# Altium PCB mccd.PcbDoc
Units mil, origin at the board's own origin, x right, y up, seen from the top; angles counter-clockwise.
Board outline 1680 x 1250 mil, 2 copper layers (Top, Bottom); 9 components, 12 nets, 61 pads, 0 vias.
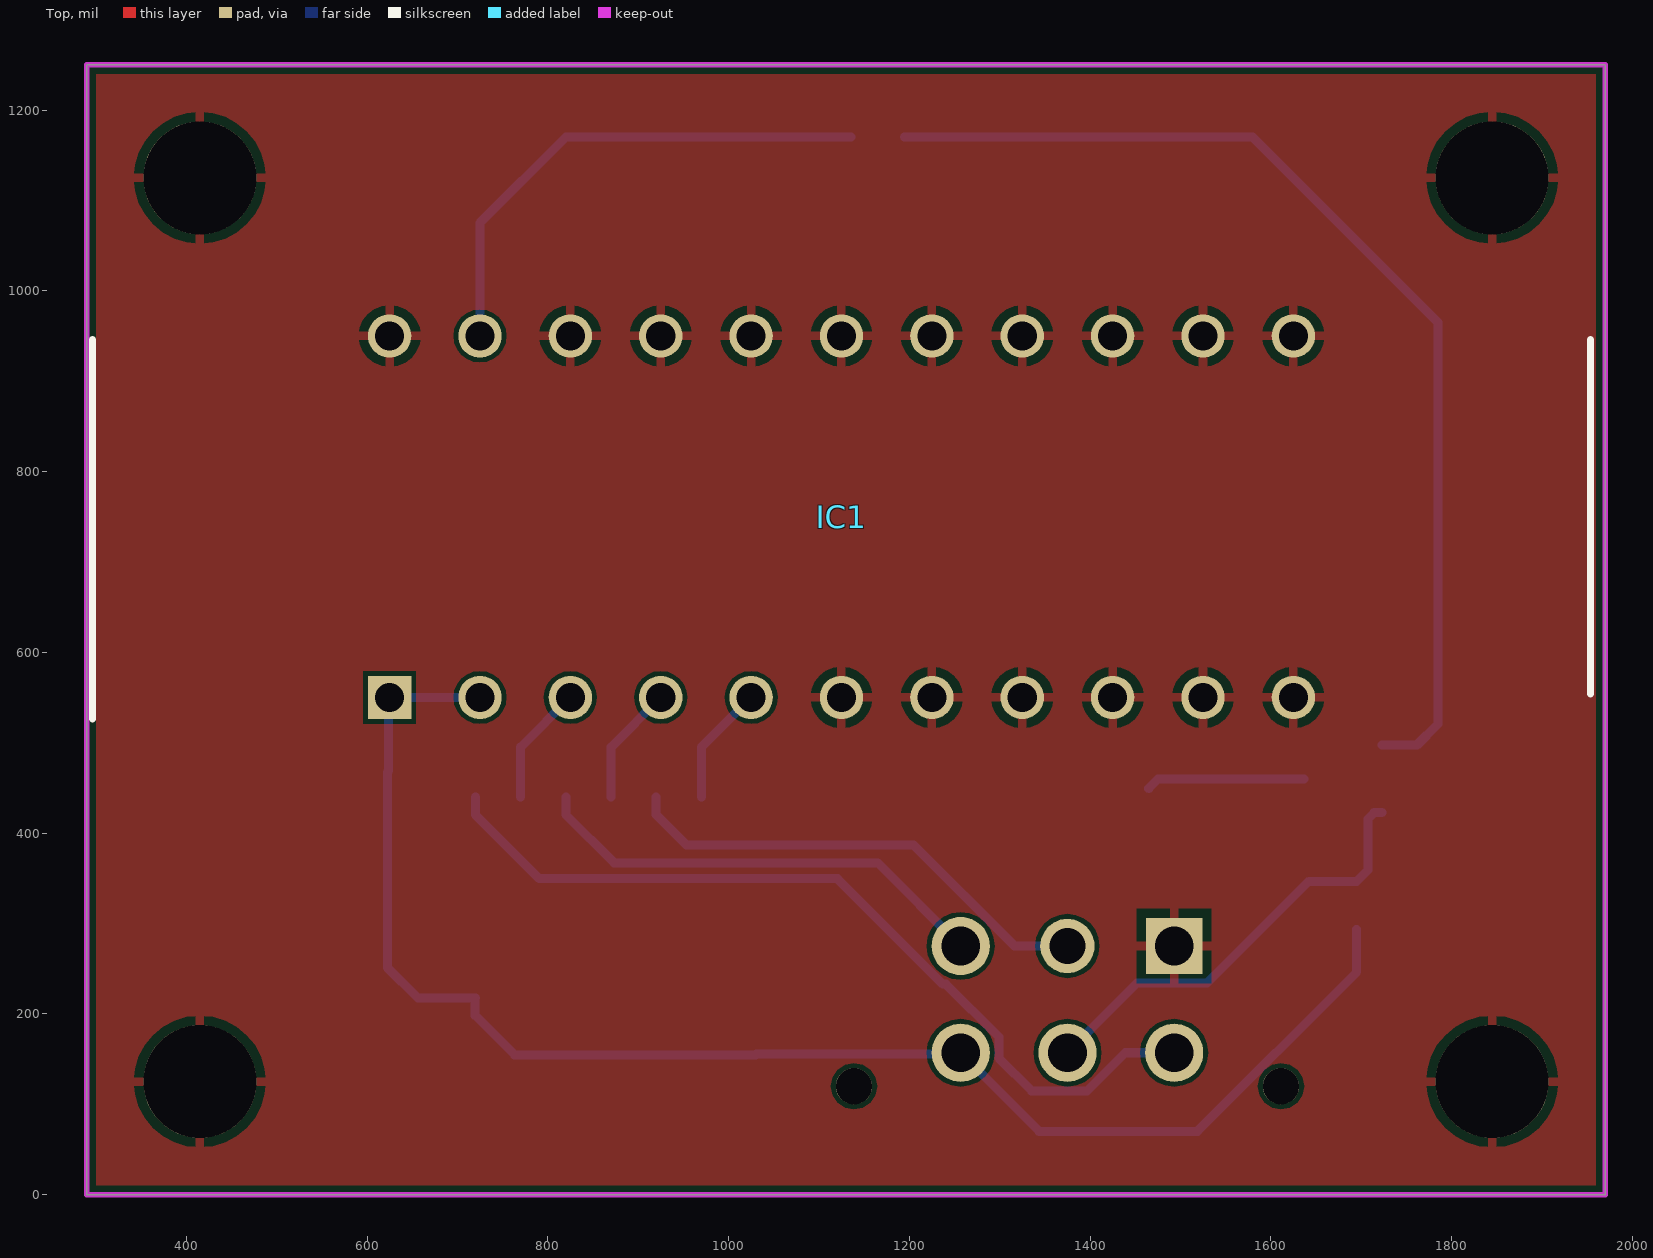
[diagram p0: Top view]
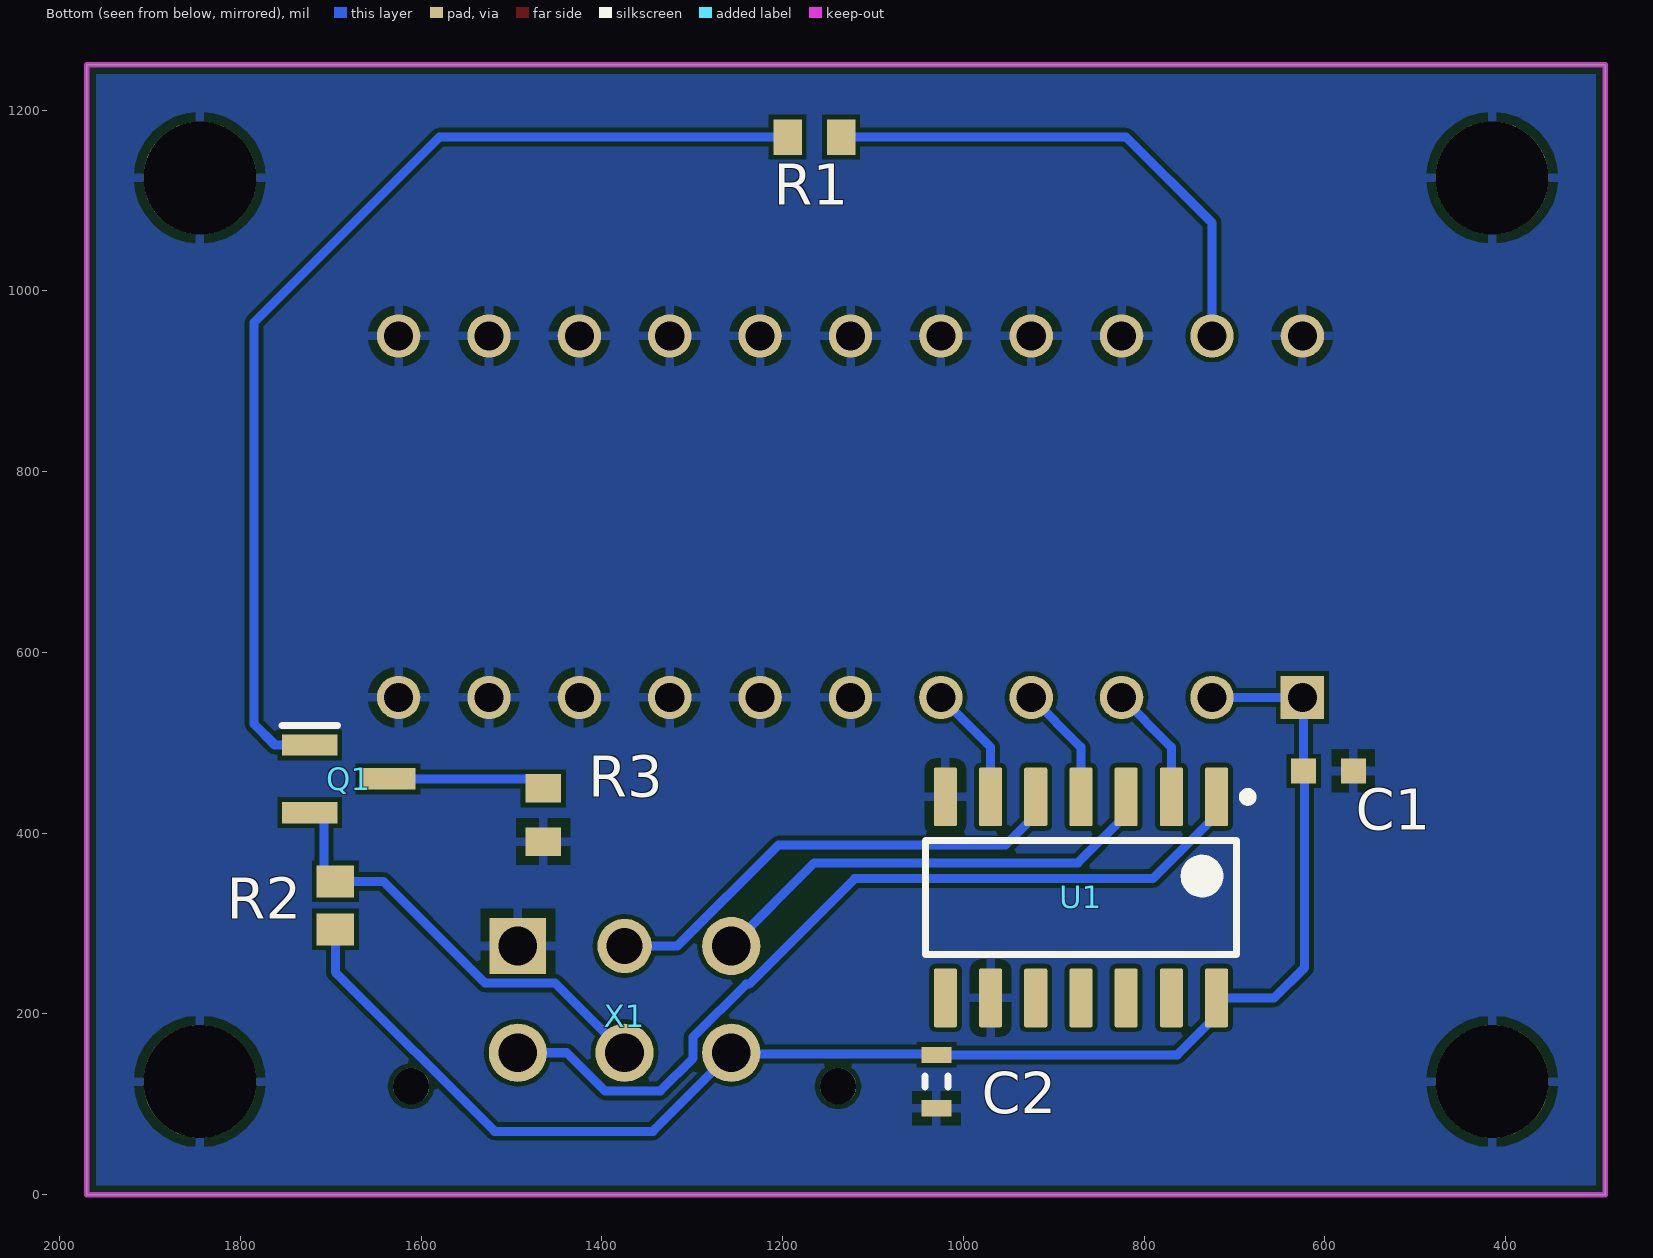
[diagram p1: Bottom view, seen from below]

## Layer stack, top to bottom
Top Solder: solder mask 0.4, Solder Resist, Dk 3.5
Top: signal copper 1.378
Dielectric 1: dielectric 12.6, FR-4, Dk 4.8
Bottom: signal copper 1.378
Bottom Solder: solder mask 0.4, Solder Resist, Dk 3.5

## Board outline
290,0 1970,0 1970,1250 290,1250

## Design rules (kind name [scope] priority, off if disabled: settings)
BoardOutlineClearance mdCopperDimension [All] p1: gap=10 ignorepadtopadclearanceinfootprint=FALSE except(0: Arc-SplitContinuation Track-SplitContinuation SMDPad-SplitContinuation THPad-SplitContinuation Via-SplitContinuation Fill-SplitContinuation Poly-SplitContinuation Region-SplitContinuation Text-SplitContinuation)
Clearance "Clearance (Same Net)" [All] p1: gap=5 ignorepadtopadclearanceinfootprint=FALSE except(0: SMDPad-SMDPad SMDPad-THPad SMDPad-Via)
Clearance [All] p2: gap=5 ignorepadtopadclearanceinfootprint=FALSE except(0: Arc-Poly Track-Poly SMDPad-Poly THPad-Poly Via-Poly Fill-Poly Poly-Poly Poly-Region Poly-Text; 10: Poly-Hole)
HoleSize [All] p1: absolutevalues=TRUE maxlimit=100000 minlimit=12 maxpercent=80.000 minpercent=20.000
HoleToHoleClearance mdDrill [All] p1: gap=10 allowstackedmicrovias=TRUE
PasteMaskExpansion mlMinCreamFrame [All] p1: expansion=0
PolygonConnect PolygonConnect_For_PolygonThermal_ON_Width160000_Gap100000 [InPolygonClass('PolygonThermal_ON_Width160000_Gap100000') vs Not IsVia] p1: connectstyle=Relief reliefconductorwidth=16 reliefentries=4 polygonreliefangle="90 Angle" airgapwidth=10
PolygonConnect ThermalVias [IsVia] p2: connectstyle=Direct reliefconductorwidth=10 reliefentries=4 polygonreliefangle="90 Angle" airgapwidth=10
PolygonConnect [All] p3: connectstyle=Relief reliefconductorwidth=10 reliefentries=4 polygonreliefangle="90 Angle" airgapwidth=10
RoomDefinition mccd [InComponentClass('mccd')] p1: confinementstyle=ConfineIn formatcopy=TRUE lockcomponents=FALSE outline 290,0 1970,0 1970,1250 290,1250
RoutingVias [All] p1: holewidth=12 width=24 viastyle="Through Hole" minholewidth=12 minwidth=24 maxholewidth=100 maxwidth=100
SolderMaskExpansion mlMinStopFrame [All] p1: expansion=2
Width [All] p1: maxlimit=10000 minlimit=5 preferedwidth=5
27 further rules are at their usual default settings.

## Classes and differential pairs
component class mccd: C1 C2 IC1 Q1 R1 R2 R3 U1

## Components (designator, comment, footprint, x,y, rotation, side; value= is the part's Value field where it differs from the comment)
C1 "C1608X5R1E106M080AC" CAPC1608X100X20VL10T10 596.1,468.66 r0 bottom
C2 "CGA3E2X7R1H104K080AA" CAPC1608X90X20LL10 1030,125 r90 bottom
IC1 "TCD1304DG(8Z,AW)" DIP1016W62P254L4160H372Q22N 1125,750 r90 top
Q1 "2SA1162-GR,LF" SOT95P260X140-3N 1680,460 r180 bottom
R1 "RC0603FR-07150RL" RESC1608X55X25ML10T15 1165,1170 r180 bottom
R2 "CRCW06032K20JNEA" RESC1609X50X30ML10T20 1695,320 r90 bottom
R3 "RC0603FR-07150RL" RESC1608X55X25ML10T15 1465,420 r90 bottom
U1 "SN74HC04DR" D0014A_M 870,328.78 r270 bottom
X1 "Molex - Micro-Fit 3.0 Series connector,  3.00mm (0.118\") pitch header, 6 positions." 44914-0601 1375,275 r0 bottom

## Footprints (in the part's own frame and the unit in brackets; to place one, negate y for a bottom-side part, rotate by r counter-clockwise, add the part's x,y. Pads: shape width x height; smd on the part's side, far side on the other; paste and mask are expansions set on the pad)
44914-0601 [mm]
  round 1.02 hole 1.02 unplated: 1(-6,3.94) 1(6,3.94)
  rect 1.583x1.583 / inner rect 1.524x1.524 / far side rect 1.583x1.583 hole 1.09: P$1(3,0)
  round 1.53 / inner round 1.524 / far side round 1.53 hole 1.02: P$2(0,0)
  round 1.635 / inner round 1.524 / far side round 1.635 hole 1.09: P$3(-3,0) P$4(3,3) P$5(0,3) P$6(-3,3)
  body extent -6.57,-2.45 6.58,6.35, height 9.95
CAPC1608X90X20LL10 [mm] "Chip Capacitor, 2-Leads, Body 1.70x0.90mm, IPC High Density"
  rect 0.45x0.85 smd: 1(-0.75,0) 2(0.75,0)
  silkscreen extent -0.15,-0.33 0.15,0.33, body extent -0.85,-0.45 0.85,0.45, height 0.9
CAPC1608X100X20VL10T10 [mm] "Chip CAP, 2-Leads, Body 1.6x0.8mm"
  rect 0.7x0.7 smd: 1(-0.7,0) 2(0.7,0)
  body extent -0.8,-0.4 0.8,0.4, height 1
D0014A_M [mm] "SOIC, 14-Leads, Body 8.75x4mm, Pitch 1.27mm, IPC Low Density"
  rrect15% 1.65x0.65 smd: 1(-2.825,3.81) 2(-2.825,2.54) 3(-2.825,1.27) 4(-2.825,0) 5(-2.825,-1.27) 6(-2.825,-2.54) 7(-2.825,-3.81) 8(2.825,-3.81) 9(2.825,-2.54) 10(2.825,-1.27) 11(2.825,0) 12(2.825,1.27) 13(2.825,2.54) 14(2.825,3.81)
  silkscreen extent -2.95,-4.38 1.6,4.81, body extent -3.02,-4.32 3.02,4.32, height 1.59
DIP1016W62P254L4160H372Q22N [mm]
  rect 1.22x1.22 hole 0.82: 1(-5.08,12.7)
  round 1.22 hole 0.82: 2(-5.08,10.16) 3(-5.08,7.62) 4(-5.08,5.08) 5(-5.08,2.54) 6(-5.08,0) 7(-5.08,-2.54) 8(-5.08,-5.08) 9(-5.08,-7.62) 10(-5.08,-10.16) 11(-5.08,-12.7) 12(5.08,-12.7) 13(5.08,-10.16) 14(5.08,-7.62) 15(5.08,-5.08) 16(5.08,-2.54) 17(5.08,0) 18(5.08,2.54) 19(5.08,5.08) 20(5.08,7.62) 21(5.08,10.16) 22(5.08,12.7)
  silkscreen extent -5.69,-21.05 4.97,21.05, body extent -5.24,-20.8 5.24,20.8, height 3.72
RESC1608X55X25ML10T15 [mm] "Chip Resistor, 2-Leads, Body 1.70x0.90mm, IPC Low Density"
  rect 0.8x1 smd: 1(-0.75,0) 2(0.75,0)
  body extent -0.85,-0.45 0.85,0.45, height 0.55
RESC1609X50X30ML10T20 [mm] "Chip Resistor, 2-Leads, Body 1.55x0.85mm, IPC Low Density"
  rect 0.9x1.05 smd: 1(-0.675,0) 2(0.675,0)
  body extent -0.82,-0.48 0.82,0.48, height 0.5
SOT95P260X140-3N [mm]
  rect 1.55x0.6 smd: 1(-1.1,0.95) 2(-1.1,-0.95) 3(1.1,0)
  silkscreen extent -1.88,1.5 -0.33,1.5

## Part data
C1: library part CMP-2000-05442-1, "Chip Capacitor, 10 uF, +/- 20%, 25 V, -55 to 85 degC, 0603 (1608 Metric), RoHS, Tape and Reel", Capacitance=10礔, Manufacturer=TDK, Operating Temperature=-55degC~85degC, Package / Case=0603(1608Metric), Package Description="2-Pin Surface Mount Device, Body 1.6 x 0.8 mm", Package Reference=1608, PCN Part Number=MLCCPartNumberChange30/Nov/2012, Ratings=-, Standard Package=1, Temperature Coefficient=X5R, Tolerance=±20%, Voltage - Rated=25V, Applications=GeneralPurpose, Category=Capacitors, Datasheet URL=http://download.siliconexpert.com/pdfs/2016/2/22/9/40/35/949/tdk_/manual/8010476609961980104703407078c1608x5r1e106m080ac.pdf.pdf, Datasheet Version=Feb-16, Design Resources=20WNon-IsolatedBuckLEDDriverUsingPLLNK460KG, Family=CeramicCapacitors, Features=-, Height - Seated (Max)=-, Kits=445-9014-KIT-ND-KITMLCC100PF-22UF060310-50V, Lead Spacing=-, Lead Style=-, Manufacturer URL=http://www.tdk.com/, Mounting Type=SurfaceMount,MLCC, Online Catalog=CSeries,GeneralPurpose, Other Names=445-9015-1, Packaging=CutTape(CT)牋, Product Training Modules=SEAT,CCV,andTVCLDesignToolsGuidetoReplacinganElectrolyticCapacitorwithanMLCC, RoHS Information=RoHSCertificate-MLCC, Series=C, Size / Dimension="0.063\"Lx0.031\"W(1.60mmx0.80mm)", Thickness (Max)="0.039\"(1.00mm)"
C2: library part CMP-2000-07546-1, "Chip Capacitor, 0.1 uF, +/- 10%, 50 V, -55 to 125 degC, 0603 (1608 Metric), RoHS, Tape and Reel", Capacitance=100nF, Case/Package=0603, Case Code (Metric)=1608, Dielectric=X7R, Manufacturer=TDK, Max Operating Temperature=125degC, Min Operating Temperature=-55degC, Package Description="2-Pin Surface Mount Device, Body 1.6 x 0.8 mm", Package Quantity=1, Package Reference=603, Tolerance=10%, Voltage=50V, Case Code (Imperial)=0603, Composition=Ceramic, Datasheet URL=https://product.tdk.com/info/en/catalog/datasheets/mlcc_automotive_general_en.pdf, Datasheet Version=12/2014, Depth=0.8mm, Height=0.8mm, Lead Free=LeadFree, Length=1.6mm, Manufacturer URL=http://www.tdk.com/, Mount=SurfaceMount, Mounting Technology=SurfaceMount, Packaging=TapeandReel, Radiation Hardening=No, REACH SVHC=NoSVHC, RoHSCompliant=True, Termination=SMD/SMT, Thickness=0.035inch, Voltage Rating=50V, Voltage Rating (DC)=50V, Weight=7.1E-05oz, Width=0.8mm
IC1: "Integrated Circuit", Manufacturer_Name=Toshiba, Mouser Part Number=757-TCD1304DG8ZAW, Datasheet Link=http://www.spectralproducts.com/pdf/TCD1304.pdf, Height=3.72mm, Manufacturer_Part_Number=TCD1304DG(8Z,AW), Mouser Price/Stock=https://www.mouser.com/Search/Refine.aspx?Keyword=757-TCD1304DG8ZAW
Q1: "Transistor BJT PNP", Manufacturer_Name=Toshiba, Mouser Part Number=757-2SA1162-GRLF, Datasheet Link=http://toshiba.semicon-storage.com/info/docget.jsp?did=19351&prodName=2SA1162, Height=1.4mm, Manufacturer_Part_Number=2SA1162-GR,LF, Mouser Price/Stock=https://www.mouser.com/Search/Refine.aspx?Keyword=757-2SA1162-GRLF
R1 R3: library part CMP-1659-00057-1, "Chip Resistor, 150 Ohm, +/- 1%, 0.1 W, -55 to 155 degC, 0603 (1608 Metric), RoHS, Tape and Reel", Case\Package=Radial, Colour=Green, Forward Voltage="2.2 V", Package Quantity=1000, ComponentLink1Description="Manufacturer URL", ComponentLink1URL=http://www.yageo.com/, ComponentLink2Description=Datasheet, ComponentLink2URL=http://www.yageo.com/documents/recent/PYu-RC_Group_51_RoHS_L_04.pdf, DatasheetVersion="Rev. 4, 02/2016", Height="8.6 mm", Illumination Colour=Green, Lens Style=Clear, Luminous Intensity="200 mcd", Mount="Through Hole", Nominal Vf="2.2 V", PackageDescription="2-Pin Surface Mount Device, Body 1.6 x 0.8 mm", PackageReference=0603, Packaging=Bulk, RoHSCompliant=true, Viewing Angle="20 degrees"
R2: library part CMP-2000-03169-1, Manufacturer="Vishay Dale", Part Number=CRCW06032K20JNEA
U1: library part CMP-1615-00282-2, "Hex Inverters, D0014A, LARGE T&R", F @ Nom Voltage(Max)(Mhz)=20, Generic Part Number=SN74HC04, ICC @ Nom Voltage(Max)(mA)=0.02, Manufacturer="Texas Instruments", Operating Temperature Range(C)="-40 to 85", Rating=Catalog, Voltage(Nom)(V)=5, Bits(#)=6, Code_JEDEC=MS-012, DatasheetVersion=SCLS078F, Input Type=CMOS, Output Drive (IOL/IOH)(Max)(mA)=-4/4, Output Type=CMOS, PackageReference=D0014A, Schmitt Trigger=No, Technology Family=HC, tpd @ Nom Voltage(Max)(ns)=20, VCC(Max)(V)=6, VCC(Min)(V)=2
X1: library part HEADER_POS6_?44914-0601, Package=44914-0601, DeviceName=44914-0601, DeviceSetName=HEADER_POS6_?, GateName_1=G$1, LibraryName=con-molex-micro-fit-3_0_2, SymbolName_1=HEADER_POS6

## Free pads (board coordinates)
  round 125 hole 125 unplated: MH1(415,1125) MH2(1845,1125) MH3(1845,125) MH4(415,125)

## Nets (pads, with @x,y where several pads share a name; then routed paths per layer and width w, separated by ;. In a path a pad name is that pad's centre, name@x,y a point inside that pad or via, vN(x,y) a via of type N, cw(c..) or ccw(c..) an arc to the next point about the centre after c; other vN are vias at no path point)
5V: C1.2 C2.2 IC1.1 IC1.2 R2.1 U1.14 X1.P$6 | length 1681.4
  Bottom w10: IC1.2 IC1.1 623.66,548.66 C1.2 622.56,467.56 622.56,251.22 656.22,217.56 U1.14 719.53,217.09 719.53,198.35 763.35,154.53 C2.2 1031.18,155.71 1255.71,155.71 X1.P$6 1343.78,70 1518.8,70 1695,246.2 R2.1
GND: C1.1 C2.1 IC1.6 IC1.7 IC1.8 IC1.9 IC1.10 IC1.11 IC1.12 IC1.13 IC1.14 IC1.15 IC1.16 IC1.17 IC1.18 IC1.19 IC1.20 IC1.22 pad.MH1 pad.MH2 pad.MH3 pad.MH4 R3.1 U1.7 U1.9 X1.P$1
NetIC1_3: IC1.3 U1.2 | length 132.8
  Bottom w10: U1.2 770,495 IC1.3
NetIC1_4: IC1.4 U1.4 | length 132.8
  Bottom w10: U1.4 870,495 IC1.4
NetIC1_5: IC1.5 U1.6 | length 132.8
  Bottom w10: U1.6 970,495 IC1.5
NetIC1_21: IC1.21 R1.2 | length 574.8
  Bottom w10: IC1.21 725,1075 820,1170 R1.2
NetQ1_1: Q1.1 R1.1 | length 1191.1
  Bottom w10: R1.1 1580,1170 1785,965 1785,520.58 1761.82,497.4 Q1.1
NetQ1_2: Q1.2 R2.2 X1.P$5 | length 491.5
  Bottom w10: X1.P$5 1451.95,233.84 1529.31,233.84 1642.05,346.57 R2.2 1707.72,359.29 1707.72,415.79 1714.53,422.6 Q1.2
NetQ1_3: Q1.3 R3.2 | length 176
  Bottom w10: R3.2 1475.47,460 Q1.3
NetU1_1: U1.1 X1.P$4 | length 950.6
  Bottom w10: U1.1 720,420.31 790.66,349.65 1120.35,349.65 1237.18,232.82 1240.62,232.82 1299.07,174.36 1299.07,150.93 1335.29,114.71 1396.87,114.71 1439.05,156.89 X1.P$4
NetU1_3: U1.3 X1.P$3 | length 516.8
  Bottom w10: U1.3 820,420.31 873.42,366.89 1165,366.89 X1.P$3
NetU1_5: U1.5 X1.P$2 | length 534.9
  Bottom w10: U1.5 920,420.31 953.64,386.68 1204.87,386.68 1316.55,275 X1.P$2
pads on no net: U1.8 U1.10 U1.11 U1.12 U1.13 X1.1

## Polygon pours and split planes (outlines as drawn)
GND on Top "GND" (solid, pour order 12): 290,1250 290,0 295,5 1965,5 1965,1245 1970,1250
GND on Bottom "GND" (solid, pour order 10): 290,1250 290,0 1970,0 1970,1250
no net on Bottom Solder (solid): 300.62,900 300.62,612.58 1655.62,612.58 1655.62,900

## Keep-outs
Keep-Out Layer:
  the board outline again, w6.06